# Altium PCB main_board.PcbDoc
Units mm, origin at the board's own origin, x right, y up, seen from the top; angles counter-clockwise.
Board outline 102 x 125 mm, 2 copper layers (Top Layer, Bottom Layer), stack 1.58 mm thick; 104 components, 116 nets, 582 pads, 10 vias.
Unrouted connection lines stored in the file: 179.
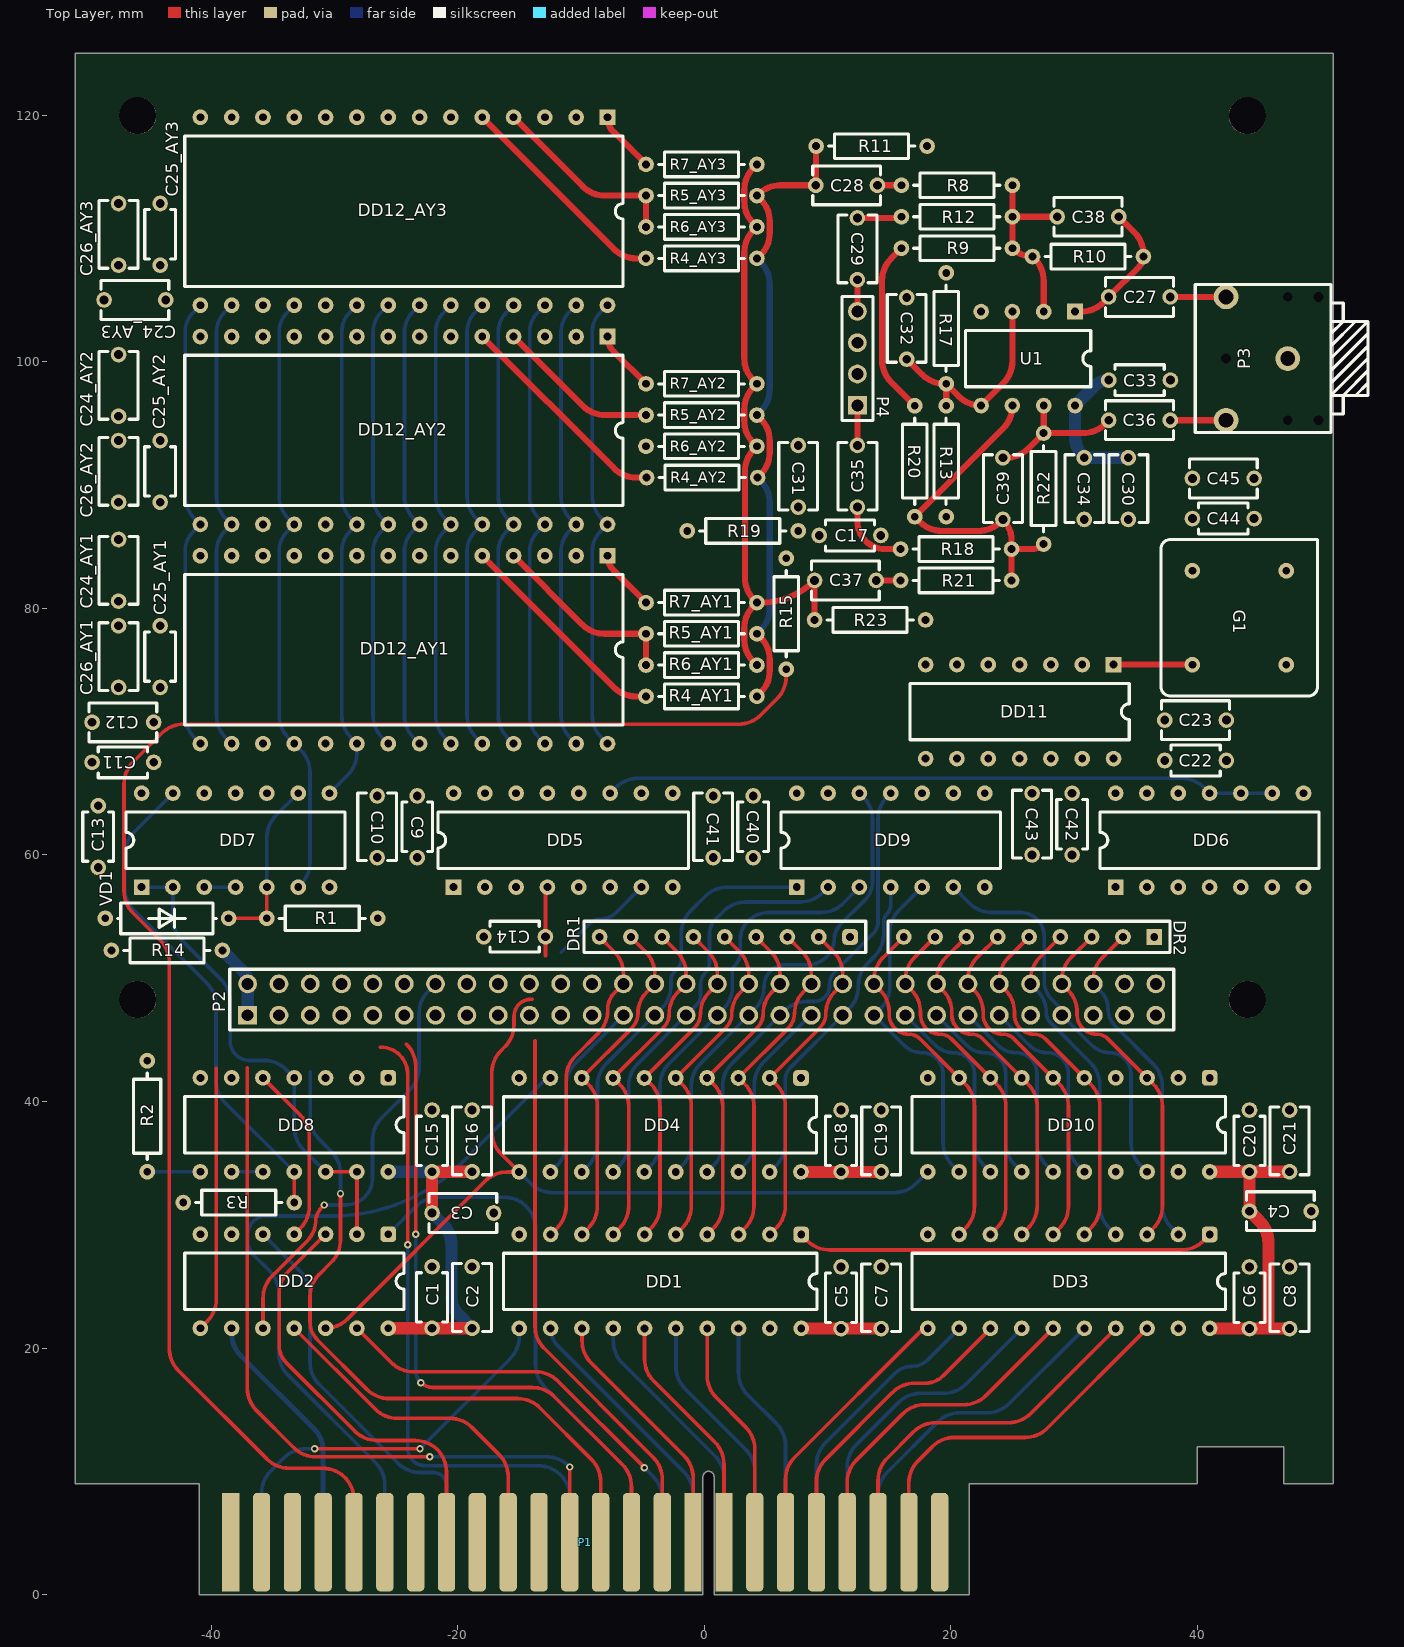
[diagram p0: Top Layer view]
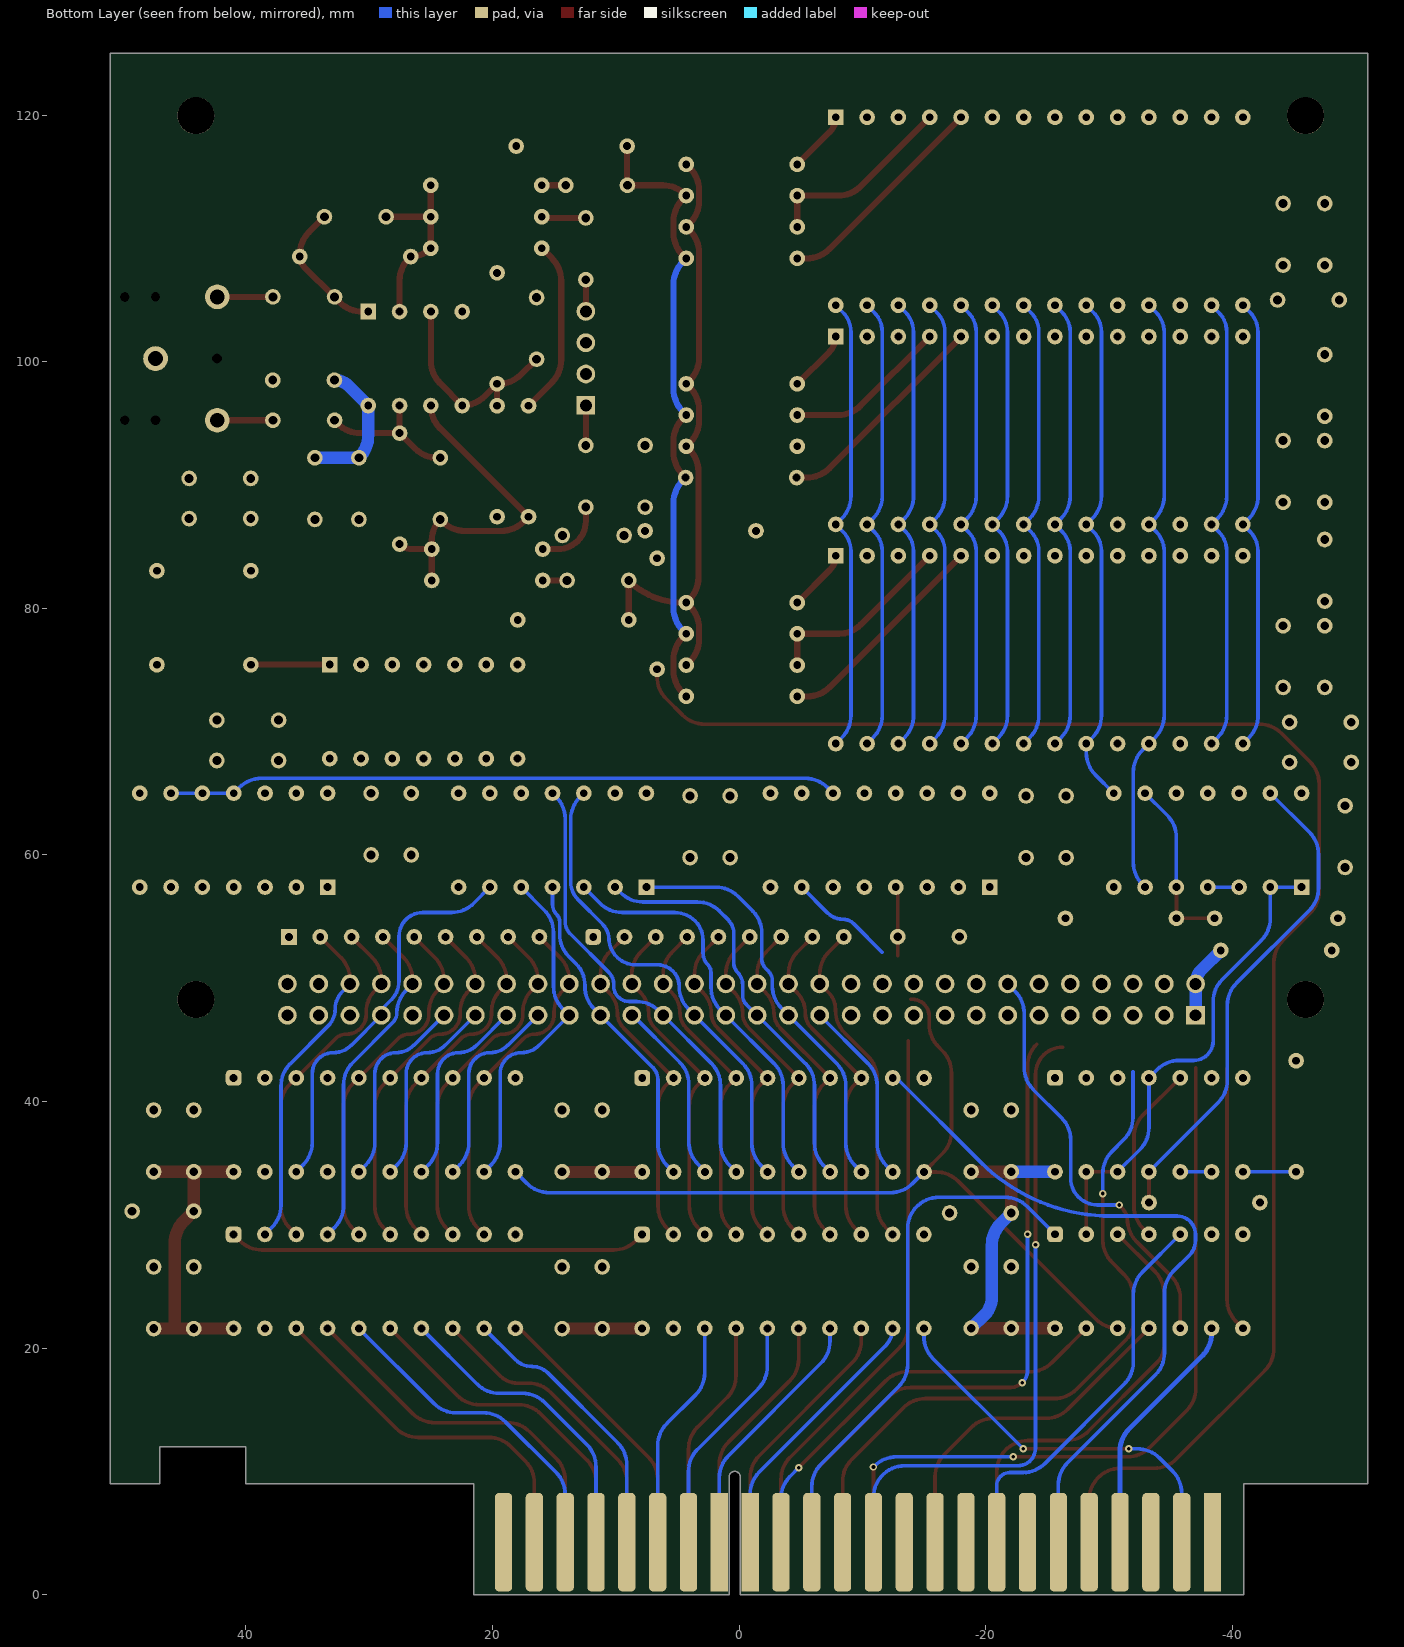
[diagram p1: Bottom Layer view, seen from below]
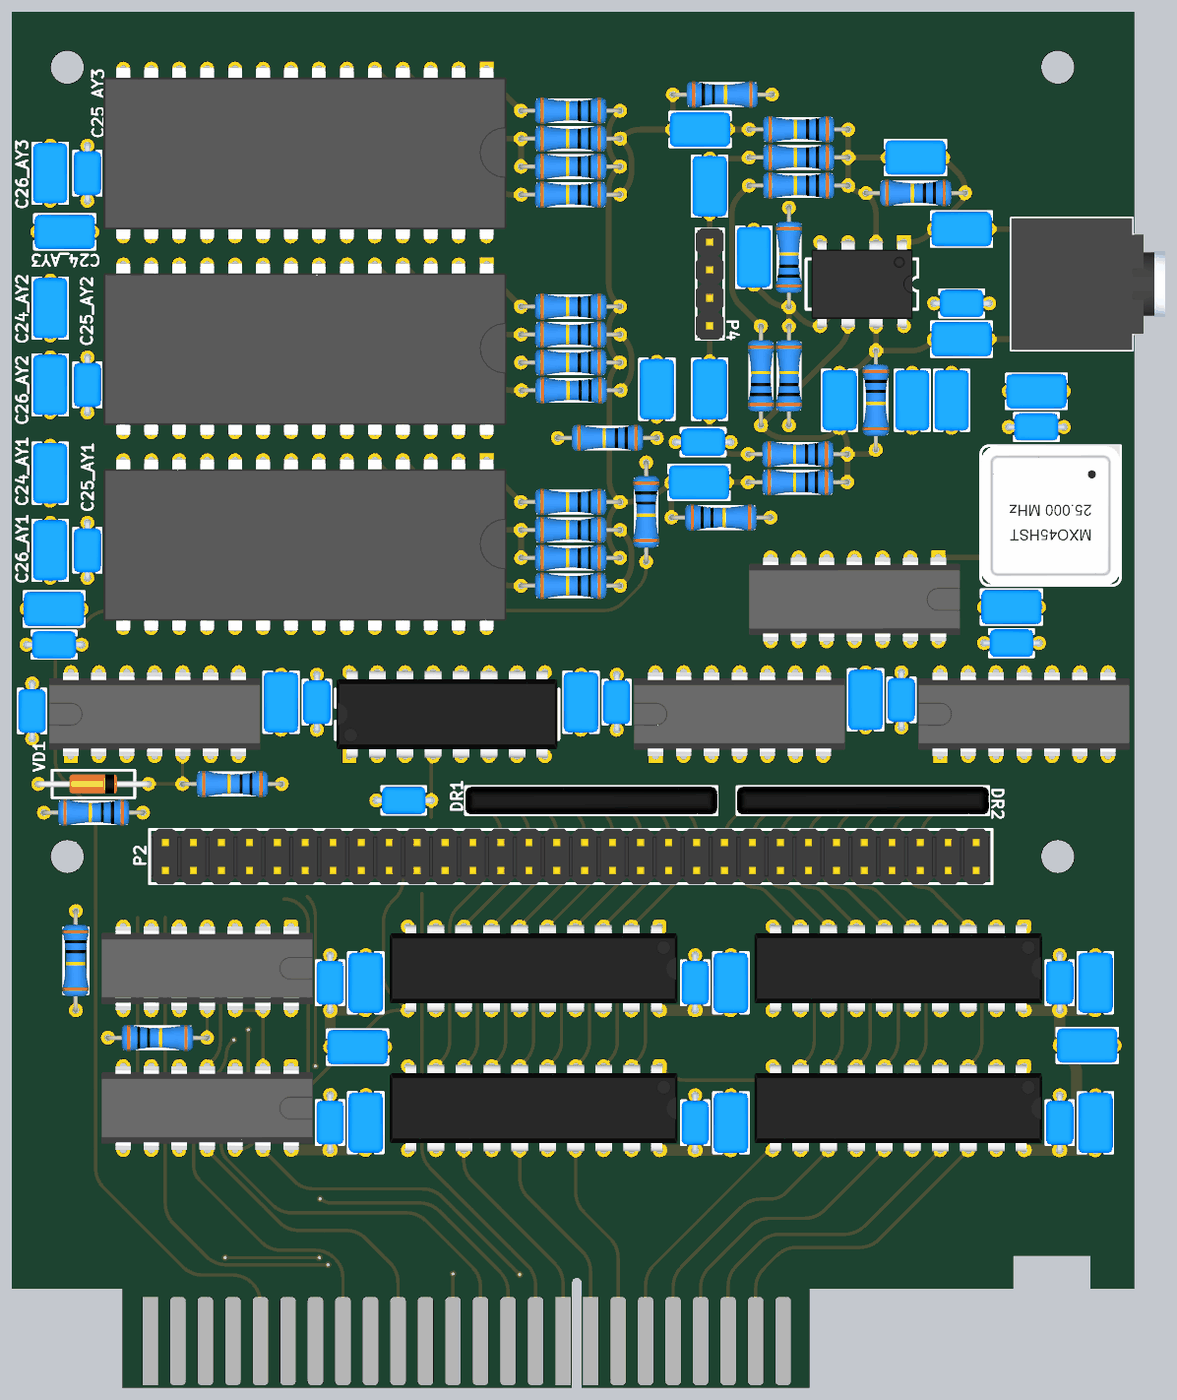
[diagram p2: 3D render of the assembled board from above, using the file's embedded part models]

## Layer stack, top to bottom
Top Solder: solder mask 0.0102, Solder Resist, Dk 3.5
Top Layer: signal copper 0.035
Dielectric 1: dielectric 1.51, FR-4, Dk 4.8
Bottom Layer: signal copper 0.035
Bottom Solder: solder mask 0.0102, Solder Resist, Dk 3.5

## Board outline
-40.95,0 -0.1,0 -0.1,9.552 cw(c0.35,9.55) 0.8,9.55 0.8,0 21.5,0 21.5,9 40,9 40,12 47,12 47,9 51,9 51,125 -51,125 -51,9 -40.95,9

## Design rules (kind name [scope] priority, off if disabled: settings)
BoardOutlineClearance [OnCopper] p1: gap=0.25 ignorepadtopadclearanceinfootprint=FALSE
Clearance BigHoleClearance [IsPad && HoleDiameter > 5] p1: gap=0.15 ignorepadtopadclearanceinfootprint=FALSE except(0.45: Arc-Hole Track-Hole SMDPad-Hole THPad-Hole Via-Hole Fill-Hole Poly-Hole Region-Hole Text-Hole)
Clearance KeepOutClearance [Keepout] p2: gap=0.2 ignorepadtopadclearanceinfootprint=FALSE
Clearance PolygonClearanceAllLayers [All vs InPolygon] p3: gap=0.2 ignorepadtopadclearanceinfootprint=FALSE
Clearance ClearanceInternalLayers [All vs OnMid] p4: gap=0.1 ignorepadtopadclearanceinfootprint=FALSE
Clearance ClearanceTopBottomLayers [All] p5: gap=0.15 ignorepadtopadclearanceinfootprint=FALSE
ComponentClearance [All] p1: gap=0.15 collisioncheckmode=3 verticalgap=0.15 showdistances=FALSE
DiffPairsRouting [All] p1: maxlimit=0.15 minlimit=0.1 mostfreqgap=0.15 toplayer_minwidth=0.1 toplayer_maxwidth=0.5 toplayer_prefwidth=0.3 bottomlayer_minwidth=0.1 bottomlayer_maxwidth=0.5 bottomlayer_prefwidth=0.3 maxuncoupledlength=12.7
HoleSize [All] p1: absolutevalues=TRUE maxlimit=10 minlimit=0.2 maxpercent=80.000 minpercent=20.000
HoleToHoleClearance [All] p1: gap=0.2 allowstackedmicrovias=TRUE
MatchedLengths [InDifferentialPairClass('All Differential Pairs')] p1: tolerance=0.3 checknetsindiffpair=TRUE checkdiffpairvsdiffpair=FALSE checkxsignals=FALSE checkothers=FALSE
MinimumAnnularRing [All] p1: minimumring=0.1
MinimumSolderMaskSliver [All] p1: minsoldermaskwidth=0.1
PolygonConnect [All] p1: thpad.connectstyle=Relief thpad.reliefconductorwidth=0.3 thpad.reliefentries=4 thpad.polygonreliefangle="90 Angle" thpad.airgapwidth=0.25 smdpad.connectstyle=Relief smdpad.reliefconductorwidth=0.25 smdpad.reliefentries=4 smdpad.polygonreliefangle="90 Angle" smdpad.airgapwidth=0.25 via.connectstyle=Direct via.reliefconductorwidth=0.254 via.reliefentries=4 via.polygonreliefangle="90 Angle" via.airgapwidth=0.254
RoutingVias [All] p1: holewidth=0.2 width=0.5 viastyle="Through Hole" minholewidth=0.2 minwidth=0.4 maxholewidth=1 maxwidth=2
SilkToSilkClearance [All] p1: silktosilkclearance=0.01
SilkToSolderMaskClearance [IsPad] p1: minsilkscreentomaskgap=0.01 clearancetoexposedcopper=TRUE
SolderMaskExpansion [All] p1: expansion=0.05
ViasUnderSMD [All] p1: allowed=TRUE
Width WidthInternalLayers [OnMid] p1: maxlimit=8 minlimit=0.1 preferedwidth=0.25
Width WidthTopBottomLayers [OnTopLayer Or OnBottomLayer] p2: maxlimit=8 minlimit=0.15 preferedwidth=0.25
23 further rules are at their usual default settings.

## Classes and differential pairs
channel class ay: AY1 AY2 AY3
net class R_IN[1..3]: R_IN3
net class L_IN[1..3]: L_IN3
net class CS_AY[1..3]: CS_AY1 CS_AY2 CS_AY3
net class C\S\[1..5]: C\S\1 C\S\2 C\S\3 C\S\4 C\S\5
net class C\E\[0..3]: C\E\0 C\E\1 C\E\2 C\E\3
net class AD[0..15]: AD0 AD1 AD2 AD3 AD4 AD5 AD6 AD7 AD8 AD9 AD10 AD11 AD12 AD13 AD14 AD15
net class A[0..12]: A0 A1 A2 A3 A4 A5 A6 A7 A8 A9 A10 A11 A12
component class "System Bus": C1 C2 C3 C4 C5 C6 C7 C8 DD1 DD2 DD3 DR1 DR2 P1
component class "Future Connector": P2
component class AY3: C24_AY3 C25_AY3 C26_AY3 DD12_AY3 R4_AY3 R5_AY3 R6_AY3 R7_AY3
component class AY2: C24_AY2 C25_AY2 C26_AY2 DD12_AY2 R4_AY2 R5_AY2 R6_AY2 R7_AY2
component class AY1: C24_AY1 C25_AY1 C26_AY1 DD12_AY1 R4_AY1 R5_AY1 R6_AY1 R7_AY1
component class "Audio Mixer": C17 C27 C28 C29 C30 C31 C32 C33 C34 C35 C36 C37 C38 C39 P3 P4 R8 R9 R10 R11 R12 R13 R15 R17 R18 R19 R20 R21 R22 R23 U1
component class "Address Detector": C9 C10 C11 C12 C13 C14 C15 C16 C18 C19 C20 C21 C22 C23 C40 C41 C42 C43 C44 C45 DD4 DD5 DD6 DD7 DD8 DD9 DD10 DD11 G1 R1 R2 R3 R14 VD1

## Components (designator, comment, footprint, x,y, rotation, side; value= is the part's Value field where it differs from the comment)
C1 "0.1u" "CAP 4x2.5" -22.075,24.1 r270 top
C2 "4.7u" "CAP 5.5x3.15" -18.825,24.1 r270 top
C3 "10u" "CAP 5.5x3.15" -19.575,30.95 r180 top
C4 "10u" "CAP 5.5x3.15" 46.725,31.1 r180 top
C5 "0.1u" "CAP 4x2.5" 11.1,24.075 r270 top
C6 "0.1u" "CAP 4x2.5" 44.225,24.075 r270 top
C7 "4.7u" "CAP 5.5x3.15" 14.35,24.075 r270 top
C8 "4.7u" "CAP 5.5x3.15" 47.475,24.075 r270 top
C9 "0.1u" "CAP 4x2.5" -23.275,62.275 r90 top
C10 "4.7u" "CAP 5.5x3.15" -26.525,62.275 r90 top
C11 "0.1u" "CAP 4x2.5" -47.15,67.5 r0 top
C12 "4.7u" "CAP 5.5x3.15" -47.15,70.75 r0 top
C13 "62" "CAP 4x2.5" -49.15,61.475 r270 top
C14 "200" "CAP 4x2.5" -15.375,53.36 r0 top
C15 "0.1u" "CAP 4x2.5" -22.075,36.8 r270 top
C16 "4.7u" "CAP 5.5x3.15" -18.825,36.8 r270 top
C17 "Cap" "CAP 4x2.5" 11.825,85.9 r180 top
C18 "0.1u" "CAP 4x2.5" 11.1,36.8 r270 top
C19 "4.7u" "CAP 5.5x3.15" 14.35,36.8 r270 top
C20 "0.1u" "CAP 4x2.5" 44.225,36.8 r270 top
C21 "4.7u" "CAP 5.5x3.15" 47.475,36.8 r270 top
C22 "0.1u" "CAP 4x2.5" 39.85,67.65 r180 top
C23 "4.7u" "CAP 5.5x3.15" 39.85,70.925 r180 top
C24_AY1 "10u" "CAP 5.5x3.15" -47.5,83.075 r270 top (schematic designator C24)
C24_AY2 "10u" "CAP 5.5x3.15" -47.5,98.075 r270 top (schematic designator C24)
C24_AY3 "10u" "CAP 5.5x3.15" -46.175,105 r180 top (schematic designator C24)
C25_AY1 "0.1u" "CAP 4x2.5" -44.125,76.075 r270 top (schematic designator C25)
C25_AY2 "0.1u" "CAP 4x2.5" -44.125,91.1 r270 top (schematic designator C25)
C25_AY3 "0.1u" "CAP 4x2.5" -44.125,110.325 r270 top (schematic designator C25)
C26_AY1 "4.7u" "CAP 5.5x3.15" -47.5,76.075 r270 top (schematic designator C26)
C26_AY2 "4.7u" "CAP 5.5x3.15" -47.5,91.1 r270 top (schematic designator C26)
C26_AY3 "4.7u" "CAP 5.5x3.15" -47.5,110.325 r270 top (schematic designator C26)
C27 "10u" "CAP 5.5x3.15" 35.304,105.25 r0 top
C28 "10u" "CAP 5.5x3.15" 11.55,114.3 r0 top
C29 "10u" "CAP 5.5x3.15" 12.425,109.15 r90 top
C30 "10u" "CAP 5.5x3.15" 34.4,89.7 r90 top
C31 "10u" "CAP 5.5x3.15" 7.625,90.703 r90 top
C32 "10u" "CAP 5.5x3.15" 16.425,102.7 r270 top
C33 "0.1u" "CAP 4x2.5" 35.314,98.5 r180 top
C34 "4.7u" "CAP 5.5x3.15" 30.825,89.7 r90 top
C35 "10u" "CAP 5.5x3.15" 12.425,90.703 r270 top
C36 "10u" "CAP 5.5x3.15" 35.304,95.25 r0 top
C37 "10u" "CAP 5.5x3.15" 11.45,82.25 r0 top
C38 "1200 NC" "CAP 5.5x3.15" 31.125,111.75 r180 top
C39 "1200 NC" "CAP 5.5x3.15" 24.225,89.7 r270 top
C40 "0.1u" "CAP 4x2.5" 3.975,62.275 r90 top
C41 "4.7u" "CAP 5.5x3.15" 0.725,62.275 r90 top
C42 "0.1u" "CAP 4x2.5" 29.84,62.487 r90 top
C43 "4.7u" "CAP 5.5x3.15" 26.59,62.487 r90 top
C44 "0.1u" "CAP 4x2.5" 42.1,87.275 r180 top
C45 "4.7u" "CAP 5.5x3.15" 42.1,90.525 r180 top
DD1 "74F642N" DIP20 7.865,29.21 r270 top
DD2 "74x1034" DIP14#1 -25.625,29.225 r270 top
DD3 "74F642N" DIP20 40.995,29.21 r270 top
DD4 "74x573" DIP20 7.85,41.9 r270 top
DD5 "74x138" DIP16 -20.331,57.38 r90 top
DD6 "74x27" DIP14#2 33.365,57.38 r90 top
DD7 "74x08" DIP14#2 -45.63,57.38 r90 top
DD8 "74x38" DIP14#1 -25.625,41.91 r270 top
DD9 "74x30" DIP14#2 7.509,57.38 r90 top
DD10 "74x573" DIP20 40.995,41.91 r270 top
DD11 "74x393" DIP14#2 33.2,75.425 r270 top
DD12_AY1 "AY-3-8912" DIP28 -7.844,84.256 r270 top (schematic designator DD12)
DD12_AY2 "AY-3-8912" DIP28 -7.844,102.036 r270 top (schematic designator DD12)
DD12_AY3 "AY-3-8912" DIP28 -7.844,119.816 r270 top (schematic designator DD12)
DR1 "RNA8" SIP9#1 11.83,53.34 r270 top
DR2 "RNA8" SIP9#2 36.505,53.34 r270 top
G1 "CXO" "DIP8 CXO" 49.75,85.575 r270 top
P1 "EDGE" "SNP15-48 EDGE" -38.4,4.25 r0 top locked
P2 "PLD60" PLD60 -0.2,48.26 r180 top
P3 "3.5mm audio socket" ST-111 47.325,100.25 r180 top
P4 "Header 4" PLS4 12.425,100.265 r270 top
R1 "2.2K" "Axial Res 0.25"#1 -26.475,54.85 r180 top
R2 "2.2K" "Axial Res 0.25"#2 -45.175,38.8 r270 top
R3 "2.2K" "Axial Res 0.25"#1 -42.25,31.8 r0 top
R4_AY1 "1K" "Axial Res 0.25"#1 4.28,72.85 r180 top (schematic designator R4)
R4_AY2 "1K" "Axial Res 0.25"#1 4.33,90.6 r180 top (schematic designator R4)
R4_AY3 "1K" "Axial Res 0.25"#1 4.28,108.375 r180 top (schematic designator R4)
R5_AY1 "2.2K" "Axial Res 0.25"#1 4.28,77.925 r180 top (schematic designator R5)
R5_AY2 "2.2K" "Axial Res 0.25"#1 4.28,95.67 r180 top (schematic designator R5)
R5_AY3 "2.2K" "Axial Res 0.25"#1 4.28,113.465 r180 top (schematic designator R5)
R6_AY1 "2.2K" "Axial Res 0.25"#1 4.28,75.385 r180 top (schematic designator R6)
R6_AY2 "2.2K" "Axial Res 0.25"#1 4.28,93.13 r180 top (schematic designator R6)
R6_AY3 "2.2K" "Axial Res 0.25"#1 4.28,110.925 r180 top (schematic designator R6)
R7_AY1 "1K" "Axial Res 0.25"#1 4.28,80.455 r180 top (schematic designator R7)
R7_AY2 "1K" "Axial Res 0.25"#1 4.28,98.2 r180 top (schematic designator R7)
R7_AY3 "1K" "Axial Res 0.25"#1 4.28,115.995 r180 top (schematic designator R7)
R8 "24k" "Axial Res 0.25"#1 25,114.3 r180 top
R9 "100K" "Axial Res 0.25"#1 25,109.2 r180 top
R10 "10k" "Axial Res 0.25"#1 35.625,108.525 r180 top
R11 "510" "Axial Res 0.25"#1 9.075,117.475 r0 top
R12 "24k" "Axial Res 0.25"#1 25,111.75 r180 top
R13 "1K" "Axial Res 0.25"#1 19.625,87.425 r90 top
R14 "10K" "Axial Res 0.25"#2 -43.575,52.25 r180 top
R15 "510" "Axial Res 0.25"#1 6.65,84.05 r270 top
R17 "1K" "Axial Res 0.25"#1 19.625,98.2 r90 top
R18 "24k" "Axial Res 0.25"#1 24.925,84.8 r180 top
R19 "510" "Axial Res 0.25"#1 7.625,86.275 r180 top
R20 "100K" "Axial Res 0.25"#1 17.075,87.425 r90 top
R21 "24k" "Axial Res 0.25"#1 24.925,82.25 r180 top
R22 "10k" "Axial Res 0.25"#1 27.525,94.2 r270 top
R23 "510" "Axial Res 0.25"#1 8.95,79.05 r0 top
U1 "LM358N" DIP8 30.075,104.06 r270 top
VD1 "D9B" D9 -43.575,54.85 r0 top locked

## Footprints (in the part's own frame and the unit in brackets; to place one, negate y for a bottom-side part, rotate by r counter-clockwise, add the part's x,y. Pads: shape width x height; smd on the part's side, far side on the other; paste and mask are expansions set on the pad)
"Axial Res 0.25"#1 [mm]
  round 1.27 hole 0.635: 1(0,0) 2(9,0)
  silkscreen extent 1,-1 8,1, body extent -0.19,-1.19 9.21,1.19, height 2.57
"Axial Res 0.25"#2 [mm]
  round 1.27 hole 0.635: 1(-4.5,0) 2(4.5,0)
  silkscreen extent -3.5,-1.1 3.5,1.1, body extent -4.7,-1.2 4.7,1.18, height 2.57
"CAP 4x2.5" [mm]
  round 1.27 hole 0.711: 1(-2.5,0) 2(2.5,0)
  silkscreen extent -2,-1.25 2,1.25, body extent -2.75,-1.25 2.75,1.25, height 5.8
"CAP 5.5x3.15" [mm]
  round 1.27 hole 0.711: 1(-2.5,0) 2(2.5,0)
  silkscreen extent -2.75,-1.58 2.75,1.58, body extent -2.75,-1.57 2.75,1.58, height 6.05
D9 [mm]
  round 1.27 hole 0.635: 1(-5,0) 2(5,0)
  silkscreen extent -4,-1.25 4,1.25, body extent -5.37,-0.88 5.32,0.88, height 2.15
DIP8 [mm]
  rect 1.27x1.27 hole 0.635: 1(0,0)
  round 1.27 hole 0.635: 2(0,-2.54) 3(0,-5.08) 4(0,-7.62) 5(7.62,-7.62) 6(7.62,-5.08) 7(7.62,-2.54) 8(7.62,0)
  silkscreen extent 1.52,-8.89 6.1,1.27, body extent -0.12,-8.41 7.75,0.79, height 3.85
"DIP8 CXO" [mm]
  round 1.27 hole 0.635: 1(2.54,-2.54) 4(10.16,-2.54) 5(10.16,-10.16) 8(2.54,-10.16)
  silkscreen extent 0,-12.7 12.7,0, body extent 0,-12.7 12.7,0, height 4.6
DIP14#1 [mm]
  rrect50% 1.27x1.27 hole 0.635: 1(0,0)
  round 1.27 hole 0.635: 2(0,-2.54) 3(0,-5.08) 4(0,-7.62) 5(0,-10.16) 6(0,-12.7) 7(0,-15.24) 8(7.62,-15.24) 9(7.62,-12.7) 10(7.62,-10.16) 11(7.62,-7.62) 12(7.62,-5.08) 13(7.62,-2.54) 14(7.62,0)
  silkscreen extent 1.52,-16.51 6.1,1.27, body extent 0,-17.22 7.62,1.98, height 4
DIP14#2 [mm]
  rect 1.27x1.27 hole 0.635: 1(0,0)
  round 1.27 hole 0.635: 2(0,-2.54) 3(0,-5.08) 4(0,-7.62) 5(0,-10.16) 6(0,-12.7) 7(0,-15.24) 8(7.62,-15.24) 9(7.62,-12.7) 10(7.62,-10.16) 11(7.62,-7.62) 12(7.62,-5.08) 13(7.62,-2.54) 14(7.62,0)
  silkscreen extent 1.52,-16.51 6.1,1.27, body extent 0,-17.22 7.62,1.98, height 4
DIP16 [mm]
  rect 1.27x1.27 hole 0.635: 1(0,0)
  round 1.27 hole 0.635: 2(0,-2.54) 3(0,-5.08) 4(0,-7.62) 5(0,-10.16) 6(0,-12.7) 7(0,-15.24) 8(0,-17.78) 9(7.62,-17.78) 10(7.62,-15.24) 11(7.62,-12.7) 12(7.62,-10.16) 13(7.62,-7.62) 14(7.62,-5.08) 15(7.62,-2.54) 16(7.62,0)
  silkscreen extent 1.52,-19.05 6.1,1.27, body extent -0.13,-18.92 7.75,1.14, height 5.33
DIP20 [mm]
  rrect50% 1.27x1.27 hole 0.635: 1(0,0)
  round 1.27 hole 0.635: 2(0,-2.54) 3(0,-5.08) 4(0,-7.62) 5(0,-10.16) 6(0,-12.7) 7(0,-15.24) 8(0,-17.78) 9(0,-20.32) 10(0,-22.86) 11(7.62,-22.86) 12(7.62,-20.32) 13(7.62,-17.78) 14(7.62,-15.24) 15(7.62,-12.7) 16(7.62,-10.16) 17(7.62,-7.62) 18(7.62,-5.08) 19(7.62,-2.54) 20(7.62,0)
  silkscreen extent 1.52,-24.13 6.1,1.27, body extent -0.13,-24.51 7.75,1.65, height 5.33
DIP28 [mm]
  rect 1.27x1.27 hole 0.635: 1(0,0)
  round 1.27 hole 0.635: 2(0,-2.54) 3(0,-5.08) 4(0,-7.62) 5(0,-10.16) 6(0,-12.7) 7(0,-15.24) 8(0,-17.78) 9(0,-20.32) 10(0,-22.86) 11(0,-25.4) 12(0,-27.94) 13(0,-30.48) 14(0,-33.02) 15(15.24,-33.02) 16(15.24,-30.48) 17(15.24,-27.94) 18(15.24,-25.4) 19(15.24,-22.86) 20(15.24,-20.32) 21(15.24,-17.78) 22(15.24,-15.24) 23(15.24,-12.7) 24(15.24,-10.16) 25(15.24,-7.62) 26(15.24,-5.08) 27(15.24,-2.54) 28(15.24,0)
  silkscreen extent 1.52,-34.29 13.72,1.27, body extent -0.1,-34.81 15.49,1.79, height 4.3
PLD60 [mil]
  rect 60x60 hole 38: 1(1450,50)
  round 60 hole 38: 2(1450,-50) 3(1350,50) 4(1350,-50) 5(1250,50) 6(1250,-50) 7(1150,50) 8(1150,-50) 9(1050,50) 10(1050,-50) 11(950,50) 12(950,-50) 13(850,50) 14(850,-50) 15(750,50) 16(750,-50) 17(650,50) 18(650,-50) 19(550,50) 20(550,-50) 21(450,50) 22(450,-50) 23(350,50) 24(350,-50) 25(250,50) 26(250,-50) 27(150,50) 28(150,-50) 29(50,50) 30(50,-50) 31(-50,50) 32(-50,-50) 33(-150,50) 34(-150,-50) 35(-250,50) 36(-250,-50) 37(-350,50) 38(-350,-50) 39(-450,50) 40(-450,-50) 41(-550,50) 42(-550,-50) 43(-650,50) 44(-650,-50) 45(-750,50) 46(-750,-50) 47(-850,50) 48(-850,-50) 49(-950,50) 50(-950,-50) 51(-1050,50) 52(-1050,-50) 53(-1150,50) 54(-1150,-50) 55(-1250,50) 56(-1250,-50) 57(-1350,50) 58(-1350,-50) 59(-1450,50) 60(-1450,-50)
  silkscreen extent -1507,-97 1507,97, body extent -1500,-100 1500,100, height 339
PLS4 [mil]
  rect 60x60 hole 38: 1(150,0)
  round 60 hole 38: 2(50,0) 3(-50,0) 4(-150,0)
  silkscreen extent -198,-49 198,49, body extent -200,-50 200,50, height 332
SIP9#1 [mm]
  rrect50% 1.27x1.27 hole 0.635: 1(0,0)
  round 1.27 hole 0.635: 2(0,-2.54) 3(0,-5.08) 4(0,-7.62) 5(0,-10.16) 6(0,-12.7) 7(0,-15.24) 8(0,-17.78) 9(0,-20.32)
  silkscreen extent -1.27,-21.59 1.27,1.27, body extent -1.25,-21.61 1.25,1.29, height 6.08
SIP9#2 [mm]
  rect 1.27x1.27 hole 0.635: 1(0,0)
  round 1.27 hole 0.635: 2(0,-2.54) 3(0,-5.08) 4(0,-7.62) 5(0,-10.16) 6(0,-12.7) 7(0,-15.24) 8(0,-17.78) 9(0,-20.32)
  silkscreen extent -1.27,-21.59 1.27,1.27, body extent -1.25,-21.61 1.25,1.29, height 6.08
"SNP15-48 EDGE" [mm]
  rect 1.4x8 smd far side: A1(0,0) A16(37.5,0) A17(40,0)
  rrect50% 1.4x8 smd far side: A2(2.5,0) A3(5,0) A4(7.5,0) A5(10,0) A6(12.5,0) A7(15,0) A8(17.5,0) A9(20,0) A10(22.5,0) A11(25,0) A12(27.5,0) A13(30,0) A14(32.5,0) A15(35,0) A18(42.5,0) A19(45,0) A20(47.5,0) A21(50,0) A22(52.5,0) A23(55,0) A24(57.5,0)
  rect 1.4x8 smd: B1(0,0) B16(37.5,0) B17(40,0)
  rrect50% 1.4x8 smd: B2(2.5,0) B3(5,0) B4(7.5,0) B5(10,0) B6(12.5,0) B7(15,0) B8(17.5,0) B9(20,0) B10(22.5,0) B11(25,0) B12(27.5,0) B13(30,0) B14(32.5,0) B15(35,0) B18(42.5,0) B19(45,0) B20(47.5,0) B21(50,0) B22(52.5,0) B23(55,0) B24(57.5,0)
ST-111 [mm]
  round 0 hole 0.762 unplated: 0(0,-5)
  round 2 hole 1.2: 1(0,0) 2(5,5) 3(5,-5)
  round 0 hole 0.8 unplated: ""(-2.5,5) ""(-2.5,-5) ""(0,5) ""(5,0)
  silkscreen extent -6.5,-6 7.5,6, body extent -6.5,-6 7.5,6, height 6

## Part data
C1 C2 C3 C4 C5 C6 C7 C8 C9 C10 C11 C12 C13 C14 C15 C16 C18 C19 C20 C21 C22 C23 C24_AY1 C24_AY2 C24_AY3 C25_AY1 C25_AY2 C25_AY3 C26_AY1 C26_AY2 C26_AY3 C27 C28 C29 C30 C31 C32 C33 C34 C35 C36 C37 C38 C39 C40 C41 C42 C43 C44 C45: library part Cap, "Murata ceramic capacitor"
C17: "Murata ceramic capacitor"
DD1 DD3: library part 74x642
DD2: library part "74x1034 IEEE", "ЛП19 6 buffers"
DD4 DD10: "ИР22 transparent latch"
DD5: "ИД7 3 to 8 DEMUX"
DD6: "ЛЕ4 3x3NOR"
DD7: "ЛИ1 4x2AND"
DD8: "ЛА13 4x2NAND O.C."
DD9: "ЛА2 8NAND"
DD11: "ИЕ19"
G1: Frequency=xx.xxxxxMHz
P1: library part "SNP15-48 EDGE"
P4: library part PLS4
R1 R2 R3 R4_AY1 R4_AY2 R4_AY3 R5_AY1 R5_AY2 R5_AY3 R6_AY1 R6_AY2 R6_AY3 R7_AY1 R7_AY2 R7_AY3 R8 R9 R10 R11 R12 R13 R14 R15 R17 R18 R19 R20 R21 R22 R23: library part "Axial Resistor 0.25"
VD1: library part Diode

## Free pads (board coordinates)
  round 3 hole 3 unplated: 0(-45.95,48.26) 0(-45.95,119.95) 0(44.05,48.26) 0(44.05,119.95)

## Via types
v1: diameter 0.6, hole 0.3, Top Layer to Bottom Layer, tented both sides, 10 vias

## Nets (pads, with @x,y where several pads share a name; then routed paths per layer and width w, separated by ;. In a path a pad name is that pad's centre, name@x,y a point inside that pad or via, vN(x,y) a via of type N, cw(c..) or ccw(c..) an arc to the next point about the centre after c; other vN are vias at no path point)
3.58MHz: DD11.4 P2.55
4MHz: DD2.8 P2.3 | length 21.5
  Top Layer w0.3: DD2.8 -40.319,22.151 ccw(c-42.115,23.947) -39.575,23.947 -39.575,42.7
+5: C1.2 C2.2 C3.2 C4.2 C5.2 C6.2 C7.2 C8.2 C9.2 C10.2 C11.2 C12.2 C15.2 C16.2 C18.2 C19.2 C20.2 C21.2 C22.2 C23.2 C24_AY1.2 C24_AY2.2 C24_AY3.2 C25_AY1.2 C25_AY2.2 C25_AY3.2 C26_AY1.2 C26_AY2.2 C26_AY3.2 C30.2 C33.2 C34.2 C40.2 C41.2 C42.2 C43.2 C44.2 C45.2 DD1.20 DD2.14 DD3.20 DD4.20 DD5.16 DD6.14 DD7.14 DD8.14 DD9.14 DD10.20 DD11.14 DD12_AY1.3 DD12_AY1.19 DD12_AY2.3 DD12_AY2.19 DD12_AY3.3 DD12_AY3.19 DR1.1 DR2.1 G1.8 P1.A1 P1.A24 P2.1 P2.2 R1.1 R2.1 R3.1 R13.1 R14.1 U1.8 | length 84.2
  Top Layer w1: DD2.14 -18.825,21.605 C2.2 ; C3.2 C15.2 C16.2 ; DD4.20 14.302,34.28 ccw(c14.302,34.348) C19.2 ; DD1.20 14.314,21.59 cw(c14.314,21.539) C7.2 ; DD3.20 45.768,21.59 ; DD10.20 C20.2@44.223,34.29 ; C8.2 ccw(c47.439,21.539) 47.439,21.59 45.768,21.59 ; C21.2 cw(c47.451,34.324) 47.451,34.29 C20.2@44.223,34.29 ; C20.2@44.223,34.29 44.225,34.288 C4.2 45.024,30.3 cw(c43.228,28.504) 45.768,28.504 45.768,21.59
  Bottom Layer w1: R14.1 -37.507,50.682 cw(c-38.66,49.53) P2.2 P2.1 ; DD8.14 -25.625,34.3 C15.2 ; C3.2 -21.244,30.119 cw(c-23.04,28.323) -20.5,28.323 -20.5,24.075 ccw(c-18.569,24.075) -19.934,22.709 C2.2 ; C33.2 ccw(c32.814,96.86) 31.655,98.02 U1.8 30.075,94.002 ccw(c32.615,94.002) 30.819,92.206 C34.2 34.374,92.2 cw(c34.374,92.163) C30.2@34.4,92.189
A0: DD10.16 P2.49 | length 16.1
  Bottom Layer w0.3: P2.49 26.358,44.562 ccw(c27.835,46.038) 27.835,43.95 cw(c27.835,42.25) 29.535,42.25 29.535,36.642 ccw(c32.075,36.642) 30.279,34.846 DD10.16
A1: DD5.3 DD10.15 P2.47 | length 16.1
  Bottom Layer w0.3: P2.47 23.818,44.562 ccw(c25.295,46.038) 25.295,43.95 cw(c25.295,42.25) 26.995,42.25 26.995,36.642 ccw(c29.535,36.642) 27.739,34.846 DD10.15
A2: DD5.2 DD10.14 P2.45 | length 16.1
  Bottom Layer w0.3: P2.45 21.278,44.562 ccw(c22.755,46.038) 22.755,43.95 cw(c22.755,42.25) 24.455,42.25 24.455,36.642 ccw(c26.995,36.642) 25.199,34.846 DD10.14
A3: DD5.1 DD10.13 P2.43 | length 16.1
  Bottom Layer w0.3: P2.43 18.738,44.562 ccw(c20.215,46.038) 20.215,43.95 cw(c20.215,42.25) 21.915,42.25 21.915,36.642 ccw(c24.455,36.642) 22.659,34.846 DD10.13
A4: DD4.14 DD9.2 P2.29 | length 33.5
  Bottom Layer w0.3: DD4.14 -6.864,34.806 ccw(c-8.66,36.602) -6.12,36.602 -6.12,41.288 cw(c-3.58,41.288) -5.376,43.084 P2.29 -0.593,47.867 ccw(c-1.302,48.575) -0.3,48.575 -0.3,49.449 cw(c1.151,49.449) 0.125,50.475 ccw(c-0.599,51.199) 0.425,51.199 0.425,53.603 cw(c2.047,53.603) 0.9,54.75 1.581,55.431 cw(c3.377,53.635) 3.377,56.175 7.791,56.175 ccw(c7.791,58.715) 9.588,56.919 DD9.2
A4-7_9-12: DD6.13 DD9.8
A5: DD4.13 DD9.1 P2.27 | length 33.6
  Bottom Layer w0.3: DD4.13 -9.404,34.806 ccw(c-11.2,36.602) -8.66,36.602 -8.66,41.288 cw(c-6.12,41.288) -7.916,43.084 P2.27 -3.444,47.556 ccw(c-5.24,49.352) -2.7,49.352 -2.7,49.789 cw(c-1.587,49.789) -2.374,50.576 -2.15,50.8 ccw(c-2.874,51.524) -1.85,51.524 -1.85,53.648 cw(c0.69,53.648) -1.106,55.444 0.086,56.636 cw(c1.882,54.84) 1.882,57.38 DD9.1
A6: DD4.16 DD9.12 P2.33 | length 39
  Bottom Layer w0.3: DD4.16 -1.784,34.806 ccw(c-3.58,36.602) -1.04,36.602 -1.04,41.288 cw(c1.5,41.288) -0.296,43.084 P2.33 4.106,47.486 ccw(c2.31,49.282) 4.85,49.282 4.85,49.325 cw(c6.6,49.325) 6.6,51.075 8.359,51.075 ccw(c8.359,53.272) 10.531,52.941 ccw(c8.359,53.272) 10.55,53.104 ; 10.556,53.272 cw(c8.359,53.272) 10.55,53.104 ; DD9.12 12.906,64.683 cw(c11.11,62.886) 13.65,62.886 13.65,57.825 cw(c11.538,57.825) 13.03,56.33 11.063,54.363 ccw(c12.3,53.125) 10.55,53.125 cw(c9.645,53.125) 10.55,53.104
A7: DD4.15 DD9.3 P2.31 | length 33.3
  Bottom Layer w0.3: DD4.15 -4.324,34.806 ccw(c-6.12,36.602) -3.58,36.602 -3.58,41.288 cw(c-1.04,41.288) -2.836,43.084 P2.31 1.531,47.451 ccw(c-0.265,49.247) 2.275,49.247 2.275,50.471 cw(c3.129,50.471) 2.525,51.075 ccw(c1.559,52.041) 2.925,52.041 2.925,53.116 cw(c5.059,53.116) 3.55,54.625 cw(c5.24,52.935) 5.24,55.325 9.481,55.325 ccw(c9.481,57.865) 11.278,56.069 DD9.3
A8: DD4.18 DD6.2 P2.37 | length 14.9
  Bottom Layer w0.3: DD4.18@2.8,34.375 3.326,34.901 ccw(c1.53,36.697) 4.07,36.697 4.07,41.383 cw(c6.61,41.383) 4.814,43.179 P2.37@8.72,47.085
A9: DD4.17 DD9.11 P2.35 | length 37.5
  Bottom Layer w0.3: DD4.17 0.756,34.806 ccw(c-1.04,36.602) 1.5,36.602 1.5,41.288 cw(c4.04,41.288) 2.244,43.084 P2.35 6.516,47.356 cw(c8.312,45.56) 8.312,48.1 8.901,48.1 ccw(c8.901,49.367) 10.168,49.367 10.168,49.532 cw(c11.461,49.532) 10.547,50.447 13.693,53.593 ccw(c12.712,54.575) 14.1,54.575 14.1,62.919 cw(c16.64,62.919) 14.844,64.715 DD9.11
A10: DD9.5 DD10.12 P2.41 | length 27.9
  Bottom Layer w0.3: DD9.5 15.794,55.505 ccw(c17.59,53.709) 15.05,53.709 15.05,49.322 cw(c12.51,49.322) 14.306,47.526 P2.41 16.198,44.562 ccw(c17.675,46.038) 17.675,43.95 cw(c17.675,42.25) 19.375,42.25 19.375,36.642 ccw(c21.915,36.642) 20.119,34.846 DD10.12
A11: DD4.19 DD9.4 P2.39 | length 26.6
  Bottom Layer w0.3: DD4.19 5.836,34.806 ccw(c4.04,36.602) 6.58,36.602 6.58,41.756 cw(c7.991,41.756) 6.993,42.753 P2.39 11.756,47.516 ccw(c9.96,49.312) 12.5,49.312 12.5,49.398 cw(c15.04,49.398) 13.244,51.194 13.806,51.756 ccw(c12.01,53.552) 14.55,53.552 14.55,54.571 cw(c15.404,54.571) 14.8,55.175 ccw(c14.007,55.968) 15.129,55.968 DD9.4
A12: DD9.6 DD10.18 P2.53 | length 32.2
  Bottom Layer w0.3: DD9.6 21.52,56.069 ccw(c23.316,57.865) 23.316,55.325 25.65,55.325 cw(c25.65,53.4) 27.575,53.4 27.575,49.759 ccw(c29.709,49.759) 28.2,48.25 28.692,47.758 cw(c27.924,46.99) P2.53 31.438,44.562 ccw(c32.915,46.038) 32.915,43.95 cw(c32.915,42.25) 34.615,42.25 34.615,36.642 ccw(c37.155,36.642) 35.359,34.846 DD10.18
A\D\0\: DD3.15 P1.B21 | length 27
  Top Layer w0.3: P1.B21 11.6,9.123 cw(c14.14,9.123) 12.344,10.919 16.081,14.656 cw(c17.877,12.86) 17.877,15.4 21.053,15.4 ccw(c21.053,17.94) 22.849,16.144 DD3.15
A\D\1\: DD3.14 P1.A21 | length 25.2
  Bottom Layer w0.3: P1.A21 11.6,10.373 cw(c14.14,10.373) 12.344,12.169 15.756,15.581 cw(c17.552,13.785) 17.552,16.325 19.438,16.325 ccw(c19.438,18.865) 21.234,17.069 DD3.14
A\D\1\0\: DD3.11 P1.B19 | length 22.2
  Top Layer w0.3: P1.B19 6.6,9.348 cw(c9.14,9.348) 7.344,11.144 17.546,21.346 cw(c18.135,20.757) DD3.11
A\D\1\1\: DD1.18 P1.A19 | length 18.7
  Bottom Layer w0.3: DD1.18 2.785,17.992 ccw(c5.325,17.992) 3.529,16.196 5.856,13.869 cw(c4.06,12.073) 6.6,12.073 P1.A19
A\D\1\2\: DD3.17 P1.B22 | length 29.7
  Top Layer w0.3: P1.B22 14.1,9.273 cw(c16.64,9.273) 14.844,11.069 16.981,13.206 cw(c18.777,11.41) 18.777,13.95 24.683,13.95 ccw(c24.683,16.49) 26.479,14.694 DD3.17
A\D\1\3\: DD3.16 P1.A22 | length 26.5
  Bottom Layer w0.3: P1.A22 14.1,8.123 cw(c16.64,8.123) 14.844,9.919 18.931,14.006 cw(c20.727,12.21) 20.727,14.75 22.943,14.75 ccw(c22.943,17.29) 24.739,15.494 DD3.16
A\D\1\4\: DD3.18 P1.B23 | length 29.6
  Top Layer w0.3: P1.B23 16.6,9.048 cw(c19.14,9.048) 17.344,10.844 18.506,12.006 cw(c20.302,10.21) 20.302,12.75 26.023,12.75 ccw(c26.023,15.29) 27.819,13.494 DD3.18
A\D\1\5\: DD1.11 P1.A2 | length 31.7
  Top Layer w0.3: v1(-31.6,11.825) v1(-23.05,11.825)
  Bottom Layer w0.3: P1.A2 -35.9,8.223 cw(c-33.36,8.223) -35.156,10.019 -34.094,11.081 cw(c-32.298,9.285) -32.298,11.825 v1(-31.6,11.825) ; v1(-23.05,11.825) -15.739,19.136 ccw(c-17.535,20.932) -14.995,20.932 DD1.11
A\D\2\: DD3.13 P1.B20 | length 24.5
  Top Layer w0.3: P1.B20 9.1,9.173 cw(c11.64,9.173) 9.844,10.969 15.281,16.406 cw(c17.077,14.61) 17.077,17.15 17.95,17.15 ccw(c17.95,19.142) 19.358,17.733 DD3.13
A\D\3\: DD3.12 P1.A20 | length 22.8
  Bottom Layer w0.3: P1.A20 9.1,10.523 cw(c11.64,10.523) 9.844,12.319 15.495,17.97 cw(c16.775,16.689) 16.775,18.5 ccw(c16.775,20.455) 18.158,19.073 DD3.12
A\D\4\: DD1.13 P1.B16 | length 20.9
  Top Layer w0.3: DD1.13 -9.915,20.592 ccw(c-7.375,20.592) -9.171,18.796 -1.644,11.269 cw(c-3.44,9.473) -0.9,9.473 P1.B16
A\D\5\: DD1.12 P1.A16 | length 21.9
  Bottom Layer w0.3: DD1.12 ccw(c-10.439,21.59) -11.865,20.165 -1.644,9.944 cw(c-3.44,8.148) -0.9,8.148 P1.A16
A\D\6\: DD1.15 P1.B17 | length 19.8
  Top Layer w0.3: DD1.15 -4.835,19.112 ccw(c-2.295,19.112) -4.091,17.316 0.856,12.369 cw(c-0.94,10.573) 1.6,10.573 P1.B17
A\D\7\: DD1.14 P1.A17 | length 20.8
  Bottom Layer w0.3: DD1.14 -7.375,20.552 ccw(c-4.835,20.552) -6.631,18.756 0.856,11.269 cw(c-0.94,9.473) 1.6,9.473 P1.A17
A\D\8\: DD1.17 P1.B18 | length 18.7
  Top Layer w0.3: DD1.17 0.245,17.757 ccw(c2.785,17.757) 0.989,15.961 3.356,13.594 cw(c1.56,11.798) 4.1,11.798 P1.B18
A\D\9\: DD1.16 P1.A18 | length 19.8
  Bottom Layer w0.3: DD1.16 -2.295,18.497 ccw(c0.245,18.497) -1.551,16.701 3.356,11.794 cw(c1.56,9.998) 4.1,9.998 P1.A18
AD0: DD3.5 DD10.5 DD12_AY1.28 DD12_AY2.28 DD12_AY3.28 DR2.5 P2.50 | length 66.3
  Top Layer w0.3: DR2.5 24.674,51.669 ccw(c26.47,49.873) 23.93,49.873 P2.50 24.416,49.044 cw(c22.62,47.248) 25.16,47.248 25.16,47.05 ccw(c26.76,47.05) 26.76,45.45 cw(c26.76,44.159) 27.673,45.072 DD10.5 31.341,41.404 cw(c29.545,39.608) 32.085,39.608 32.085,31.512 cw(c29.545,31.512) 31.341,29.716 DD3.5
  Bottom Layer w0.3: DD12_AY1.28 -8.331,69.503 cw(c-6.535,71.299) -9.075,71.299 -9.075,84.625 cw(c-6.804,84.625) -8.41,86.23 DD12_AY2.28 -8.331,87.283 cw(c-6.535,89.079) -9.075,89.079 -9.075,102.405 cw(c-6.804,102.405) -8.41,104.01 DD12_AY3.28
AD1: DD3.6 DD10.6 DD12_AY1.27 DD12_AY2.27 DD12_AY3.27 DR2.6 P2.48 | length 66.3
  Top Layer w0.3: DR2.6 22.134,51.669 ccw(c23.93,49.873) 21.39,49.873 P2.48 21.876,49.044 cw(c20.08,47.248) 22.62,47.248 22.62,47.05 ccw(c24.22,47.05) 24.22,45.45 cw(c24.22,44.159) 25.133,45.072 DD10.6 28.801,41.404 cw(c27.005,39.608) 29.545,39.608 29.545,31.512 cw(c27.005,31.512) 28.801,29.716 DD3.6
  Bottom Layer w0.3: DD12_AY1.27 -10.871,69.503 cw(c-9.075,71.299) -11.615,71.299 -11.615,84.625 cw(c-9.344,84.625) -10.95,86.23 DD12_AY2.27 -10.871,87.283 cw(c-9.075,89.079) -11.615,89.079 -11.615,102.405 cw(c-9.344,102.405) -10.95,104.01 DD12_AY3.27
AD2: DD3.7 DD10.7 DD12_AY1.26 DD12_AY2.26 DD12_AY3.26 DR2.7 P2.46 | length 66.3
  Top Layer w0.3: DR2.7 19.594,51.669 ccw(c21.39,49.873) 18.85,49.873 P2.46 19.336,49.044 cw(c17.54,47.248) 20.08,47.248 20.08,47.05 ccw(c21.68,47.05) 21.68,45.45 cw(c21.68,44.159) 22.593,45.072 DD10.7 26.261,41.404 cw(c24.465,39.608) 27.005,39.608 27.005,31.512 cw(c24.465,31.512) 26.261,29.716 DD3.7
  Bottom Layer w0.3: DD12_AY1.26 -13.411,69.503 cw(c-11.615,71.299) -14.155,71.299 -14.155,84.625 cw(c-11.884,84.625) -13.49,86.23 DD12_AY2.26 -13.411,87.283 cw(c-11.615,89.079) -14.155,89.079 -14.155,102.405 cw(c-11.884,102.405) -13.49,104.01 DD12_AY3.26
AD3: DD3.8 DD10.8 DD12_AY1.25 DD12_AY2.25 DD12_AY3.25 DR2.8 P2.44 | length 66.3
  Top Layer w0.3: DR2.8 17.054,51.669 ccw(c18.85,49.873) 16.31,49.873 P2.44 16.796,49.044 cw(c15,47.248) 17.54,47.248 17.54,47.05 ccw(c19.14,47.05) 19.14,45.45 cw(c19.14,44.159) 20.053,45.072 DD10.8 23.721,41.404 cw(c21.925,39.608) 24.465,39.608 24.465,31.512 cw(c21.925,31.512) 23.721,29.716 DD3.8
  Bottom Layer w0.3: DD12_AY1.25 -15.951,69.503 cw(c-14.155,71.299) -16.695,71.299 -16.695,84.625 cw(c-14.424,84.625) -16.03,86.23 DD12_AY2.25 -15.951,87.283 cw(c-14.155,89.079) -16.695,89.079 -16.695,102.405 cw(c-14.424,102.405) -16.03,104.01 DD12_AY3.25
AD4: DD1.7 DD4.7 DD12_AY1.24 DD12_AY2.24 DD12_AY3.24 DR1.7 P2.30 | length 65.1
  Top Layer w0.3: DD4.7 -3.326,45.964 ccw(c-4.513,47.15) -2.835,47.15 cw(c-0.385,47.15) -2.118,48.882 P2.30 -1.47,50.348 ccw(c-4.01,50.348) -2.214,52.144 DR1.7 ; DD1.7 -6.869,29.716 ccw(c-8.665,31.512) -6.125,31.512 -6.125,39.608 ccw(c-8.665,39.608) -6.869,41.404 DD4.7@-7.375,41.91
  Bottom Layer w0.3: DD12_AY1.24 -18.491,69.503 cw(c-16.695,71.299) -19.235,71.299 -19.235,84.625 cw(c-16.964,84.625) -18.57,86.23 DD12_AY2.24 -18.491,87.283 cw(c-16.695,89.079) -19.235,89.079 -19.235,102.405 cw(c-16.964,102.405) -18.57,104.01 DD12_AY3.24
AD5: DD1.8 DD4.8 DD12_AY1.23 DD12_AY2.23 DD12_AY3.23 DR1.8 P2.28 | length 65.1
  Top Layer w0.3: DD4.8 -5.866,45.964 ccw(c-7.053,47.15) -5.375,47.15 cw(c-2.925,47.15) -4.658,48.882 P2.28 -4.01,50.348 ccw(c-6.55,50.348) -4.754,52.144 DR1.8 ; DD1.8 -9.409,29.716 ccw(c-11.205,31.512) -8.665,31.512 -8.665,39.608 ccw(c-11.205,39.608) -9.409,41.404 DD4.8@-9.915,41.91
  Bottom Layer w0.3: DD12_AY1.23 -21.031,69.503 cw(c-19.235,71.299) -21.775,71.299 -21.775,84.625 cw(c-19.504,84.625) -21.11,86.23 DD12_AY2.23 -21.031,87.283 cw(c-19.235,89.079) -21.775,89.079 -21.775,102.405 cw(c-19.504,102.405) -21.11,104.01 DD12_AY3.23
AD6: DD1.5 DD4.5 DD12_AY1.22 DD12_AY2.22 DD12_AY3.22 DR1.5 P2.34 | length 65.1
  Top Layer w0.3: DD4.5 1.754,45.964 ccw(c0.567,47.15) 2.245,47.15 cw(c4.695,47.15) 2.962,48.882 P2.34 3.61,50.348 ccw(c1.07,50.348) 2.866,52.144 DR1.5 ; DD1.5 -1.789,29.716 ccw(c-3.585,31.512) -1.045,31.512 -1.045,39.608 ccw(c-3.585,39.608) -1.789,41.404 DD4.5@-2.295,41.91
  Bottom Layer w0.3: DD12_AY1.22 -23.571,69.503 cw(c-21.775,71.299) -24.315,71.299 -24.315,84.625 cw(c-22.044,84.625) -23.65,86.23 DD12_AY2.22 -23.571,87.283 cw(c-21.775,89.079) -24.315,89.079 -24.315,102.405 cw(c-22.044,102.405) -23.65,104.01 DD12_AY3.22
AD7: DD1.6 DD4.6 DD12_AY1.21 DD12_AY2.21 DD12_AY3.21 DR1.6 P2.32 | length 65.1
  Top Layer w0.3: DD4.6 -0.786,45.964 ccw(c-1.973,47.15) -0.295,47.15 cw(c2.155,47.15) 0.422,48.882 P2.32 1.07,50.348 ccw(c-1.47,50.348) 0.326,52.144 DR1.6 ; DD1.6 -4.329,29.716 ccw(c-6.125,31.512) -3.585,31.512 -3.585,39.608 ccw(c-6.125,39.608) -4.329,41.404 DD4.6@-4.835,41.91
  Bottom Layer w0.3: DD12_AY1.21 -26.111,69.503 cw(c-24.315,71.299) -26.855,71.299 -26.855,84.625 cw(c-24.584,84.625) -26.19,86.23 DD12_AY2.21 -26.111,87.283 cw(c-24.315,89.079) -26.855,89.079 -26.855,102.405 cw(c-24.584,102.405) -26.19,104.01 DD12_AY3.21
AD8: DD1.3 DD4.3 DR1.3 P2.38 | length 27.9
  Top Layer w0.3: DD4.3 6.834,45.964 ccw(c5.647,47.15) 7.325,47.15 cw(c9.775,47.15) 8.042,48.882 P2.38 8.69,50.348 ccw(c6.15,50.348) 7.946,52.144 DR1.3 ; DD1.3 3.291,29.716 ccw(c1.495,31.512) 4.035,31.512 4.035,39.608 ccw(c1.495,39.608) 3.291,41.404 DD4.3@2.785,41.91
AD9: DD1.4 DD4.4 DR1.4 P2.36 | length 27.9
  Top Layer w0.3: DD4.4 4.294,45.964 ccw(c3.107,47.15) 4.785,47.15 cw(c7.235,47.15) 5.502,48.882 P2.36 6.15,50.348 ccw(c3.61,50.348) 5.406,52.144 DR1.4 ; DD1.4 0.751,29.716 ccw(c-1.045,31.512) 1.495,31.512 1.495,39.608 ccw(c-1.045,39.608) 0.751,41.404 DD4.4@0.245,41.91
AD10: DD3.9 DD10.9 DR2.9 P2.42 | length 29.1
  Top Layer w0.3: DR2.9 14.514,51.669 ccw(c16.31,49.873) 13.77,49.873 P2.42 14.256,49.044 cw(c12.46,47.248) 15,47.248 15,47.05 ccw(c16.6,47.05) 16.6,45.45 cw(c16.6,44.159) 17.513,45.072 DD10.9 21.181,41.404 cw(c19.385,39.608) 21.925,39.608 21.925,31.512 cw(c19.385,31.512) 21.181,29.716 DD3.9
AD11: DD1.2 DD4.2 DR1.2 P2.40 | length 27.9
  Top Layer w0.3: DD4.2 9.374,45.964 ccw(c8.187,47.15) 9.865,47.15 cw(c12.315,47.15) 10.582,48.882 P2.40 11.23,50.348 ccw(c8.69,50.348) 10.486,52.144 DR1.2 ; DD1.2 5.831,29.716 ccw(c4.035,31.512) 6.575,31.512 6.575,39.608 ccw(c4.035,39.608) 5.831,41.404 DD4.2@5.325,41.91
AD12: DD3.3 DD10.3 DR2.3 P2.54 | length 29.1
  Top Layer w0.3: DR2.3 29.754,51.669 ccw(c31.55,49.873) 29.01,49.873 P2.54 29.496,49.044 cw(c27.7,47.248) 30.24,47.248 30.24,47.05 ccw(c31.84,47.05) 31.84,45.45 cw(c31.84,44.159) 32.753,45.072 DD10.3 36.421,41.404 cw(c34.625,39.608) 37.165,39.608 37.165,31.512 cw(c34.625,31.512) 36.421,29.716 DD3.3
AD13: DD3.4 DR2.4 P2.52 | length 27.5
  Top Layer w0.3: P2.52 26.47,49.873 cw(c29.01,49.873) 27.214,51.669 DR2.4
  Bottom Layer w0.3: P2.52 27.006,48.994 cw(c25.21,47.198) 27.75,47.198 ccw(c28.892,47.198) 28.084,46.391 31.331,43.144 cw(c29.535,41.348) 32.075,41.348 32.075,31.562 ccw(c34.615,31.562) 32.819,29.766 DD3.4
AD14: DD3.2 DR2.2 P2.56 | length 27.5
  Top Layer w0.3: P2.56 31.55,49.873 cw(c34.09,49.873) 32.294,51.669 DR2.2
  Bottom Layer w0.3: P2.56 32.181,48.899 cw(c30.807,47.525) 32.75,47.525 ccw(c34.742,47.525) 33.333,46.117 36.406,43.044 cw(c34.61,41.248) 37.15,41.248 37.15,31.567 ccw(c39.69,31.567) 37.894,29.771 DD3.2
AD15: DD1.9 DR1.9 P2.26 | length 26.9
  Top Layer w0.3: DD1.9 -11.944,29.721 ccw(c-13.74,31.517) -11.2,31.517 -11.2,41.873 cw(c-8.66,41.873) -10.456,43.669 -8.569,45.556 ccw(c-10.365,47.352) -7.825,47.352 -7.825,47.475 cw(c-5.942,47.475) -7.274,48.806 P2.26 -6.55,50.348 ccw(c-9.09,50.348) -7.294,52.144 DR1.9
ADDR_DT: DD5.6 DD6.12 DD7.12 DD8.2
B\S\7\: DD4.12 DD6.1 P2.25 | length 14.9
  Bottom Layer w0.3: DD4.12 -11.944,34.806 ccw(c-13.74,36.602) -11.2,36.602 -11.2,41.288 cw(c-8.66,41.288) -10.456,43.084 P2.25
BC1: DD7.8 DD12_AY1.20 DD12_AY2.20 DD12_AY3.20 | length 42
  Bottom Layer w0.3: DD7.8 -28.908,66.482 ccw(c-30.704,68.278) -28.164,68.278 DD12_AY1.20 -28.651,69.503 cw(c-26.855,71.299) -29.395,71.299 -29.395,84.625 cw(c-27.124,84.625) -28.73,86.23 DD12_AY2.20 -28.651,87.283 cw(c-26.855,89.079) -29.395,89.079 -29.395,102.405 cw(c-27.124,102.405) -28.73,104.01 DD12_AY3.20
BDIR: DD7.6 DD12_AY1.18 DD12_AY2.18 DD12_AY3.18 | length 49.5
  Bottom Layer w0.3: DD12_AY3.18 -33.81,104.01 ccw(c-32.204,102.405) -34.475,102.405 -34.475,89.079 ccw(c-31.935,89.079) -33.731,87.283 DD12_AY2.18 -33.81,86.23 ccw(c-32.204,84.625) -34.475,84.625 -34.475,71.299 ccw(c-31.935,71.299) -33.731,69.503 DD12_AY1.18 -32.719,68.491 cw(c-34.515,66.695) -31.975,66.695 -31.975,59.387 cw(c-34.515,59.387) -32.719,57.591 DD7.6
Beeper: P1.B5 R15.2 | length 130.1
  Top Layer w0.3: P1.B5 -28.4,7.71 ccw(c-30.94,7.71) -30.94,10.25 -33.673,10.25 cw(c-33.673,12.79) -35.469,10.994 -42.631,18.156 cw(c-40.835,19.952) -43.375,19.952 -43.375,51.273 ccw(c-45.915,51.273) -44.119,53.069 -46.306,55.256 cw(c-44.51,57.052) -47.05,57.052 -47.05,65.748 cw(c-44.51,65.748) -46.306,67.544 -43.994,69.856 cw(c-42.198,68.06) -42.198,70.6 2.798,70.6 ccw(c2.798,73.14) 4.594,71.344 5.906,72.656 ccw(c4.11,74.452) 6.65,74.452 R15.2
C\E\0: P1.B12 P2.5 | length 61.2
  Top Layer w0.3: -37.05,42.725 -37.05,16.727 ccw(c-34.51,16.727) -36.306,14.931 -33.294,11.919 ccw(c-31.498,13.715) -31.498,11.175 v1(-22.25,11.175) ; P1.B12 v1(-10.9,10.35)
  Bottom Layer w0.3: v1(-22.25,11.175) -12.777,11.175 cw(c-12.777,8.635) -10.981,10.431 v1(-10.9,10.35)
C\E\1: P1.B14 P2.11 | length 53.2
  Top Layer w0.3: -24.144,44.644 cw(c-25.94,42.848) -23.4,42.848 v1(-23.4,29.225) ; v1(-22.975,17.175) -22.925,17.175 ccw(c-22.02,18.08) -22.02,16.8 -13.952,16.8 cw(c-13.952,14.26) -12.156,16.056 -6.644,10.544 cw(c-8.44,8.748) -5.9,8.748 P1.B14
  Bottom Layer w0.3: v1(-23.4,29.225) -23.4,18.201 ccw(c-21.949,18.201) v1(-22.975,17.175)
C\E\2: P1.B13 P2.7 | length 56.4
  Top Layer w0.3: v1(-29.5,32.525) -29.5,28.752 cw(c-32.04,28.752) -30.244,26.956 -31.231,25.969 ccw(c-29.435,24.173) -31.975,24.173 -31.975,22.124 ccw(c-29.926,22.124) -31.375,20.675 -27.344,16.644 ccw(c-25.548,18.44) -25.548,15.9 -15.127,15.9 cw(c-15.127,13.36) -13.331,15.156 -9.144,10.969 cw(c-10.94,9.173) -8.4,9.173 P1.B13
  Bottom Layer w0.3: -31.95,42.381 -31.95,38.702 ccw(c-29.41,38.702) -31.206,36.906 -30.244,35.944 cw(c-32.04,34.148) -29.5,34.148 v1(-29.5,32.525)
C\E\3: P1.A12 P2.9 | length 52.8
  Top Layer w0.3: -26.25,44.4 cw(c-26.25,42.2) -24.05,42.2 v1(-24.05,28.375)
  Bottom Layer w0.3: v1(-24.05,28.375) -24.05,11.9 ccw(c-22.6,11.9) -22.6,10.45 -13.44,10.45 cw(c-13.44,7.91) -10.9,7.91 P1.A12
C\S\1: DD5.9 P2.18
C\S\2: DD5.14 P2.15
C\S\3: DD5.10 P2.16
C\S\4: DD5.12 P2.17
C\S\5: DD5.7 P2.22 | length 8.6
  Bottom Layer w0.3: -11.6,52.1 -9.279,54.421 cw(c-8.425,53.568) -8.425,54.775 ccw(c-8.425,56.535) -7.181,55.29 DD5.7
C\S\_\A\Y\1: DD5.15 DD8.9 DD8.10 | length 2.5
  Bottom Layer w0.3: DD8.9 DD8.10
C\S\_\A\Y\2: DD5.11 DD6.9 DD6.10 DD6.11 | length 54.5
  Bottom Layer w0.3: DD5.11 -7.175,65.456 cw(c-5.379,63.66) -5.379,66.2 38.733,66.2 cw(c38.733,63.66) 40.529,65.456 DD6.11 DD6.9
C\S\_\A\Y\3: DD5.13 DD6.3 DD6.4 DD6.5
CLK_AY1: DD11.5 DD12_AY1.15 DD12_AY2.15 DD12_AY3.15 | length 37.2
  Bottom Layer w0.3: DD12_AY1.15 -41.351,69.503 cw(c-39.555,71.299) -42.095,71.299 -42.095,84.625 cw(c-39.824,84.625) -41.43,86.23 DD12_AY2.15 -41.351,87.283 cw(c-39.555,89.079) -42.095,89.079 -42.095,102.405 cw(c-39.824,102.405) -41.43,104.01 DD12_AY3.15
CS_AY1: DD8.8 DD12_AY1.17 R2.2 | length 4.3
  Bottom Layer w0.3: R2.2 -40.889,34.3 cw(c-40.889,34.266) DD8.8
CS_AY2: DD6.8 DD12_AY2.17
CS_AY3: DD6.6 DD12_AY3.17
D\I\N\: DD2.2 DD7.1 DD7.2 DD8.4 DD8.12 DD8.13 P2.6 | length 39.5
  Top Layer w0.3: DD8.12 DD8.13 DD2.2
  Bottom Layer w0.3: DD7.1 DD7.2 -43.09,54.842 ccw(c-40.55,54.842) -42.346,53.046 -39.194,49.894 cw(c-40.99,48.098) -38.45,48.098 -38.45,44.899 ccw(c-36.876,44.899) -36.876,43.325 -35.712,43.325 cw(c-35.712,40.785) -33.916,42.581 DD8.4 -33.245,37.882 ccw(c-30.705,37.882) -32.501,36.086 DD8.12
D\O\U\T\: DD2.4 DD8.5 P2.4 | length 14.5
  Top Layer w0.3: DD8.5 -32.769,38.894 cw(c-34.565,37.098) -32.025,37.098 -32.025,31.497 cw(c-34.565,31.497) -32.769,29.701 DD2.4
DIN: DD7.13 DD8.11 R3.2 | length 40.1
  Top Layer w0.3: R3.2 -33.245,31.805 DD8.11
  Bottom Layer w0.3: DD7.13 -46.256,61.834 ccw(c-44.46,60.038) -47,60.038 -47,57.302 ccw(c-44.46,57.302) -46.256,55.506 -40.344,49.594 cw(c-42.14,47.798) -39.6,47.798 -39.6,41.697 ccw(c-37.06,41.697) -38.856,39.901 DD8.11
DINOUT: DD7.5 DD7.9 DD8.6 R1.2 VD1.2 | length 14.2
  Top Layer w0.3: VD1.2 R1.2 -35.475,57.375 DD7.5
  Bottom Layer w0.3: DD7.5 -35.47,61.408 cw(c-32.93,61.408) -34.726,63.204 DD7.9
DLDIO: C13.2 DD8.1 R14.2 VD1.1
e4MHz: DD2.9 P1.A4 | length 20.2
  Bottom Layer w0.4: DD2.9 -38.325,21.177 ccw(c-35.785,21.177) -37.581,19.381 -31.644,13.444 cw(c-33.44,11.648) -30.9,11.648 P1.A4
eB\S\7\: DD4.9 P1.A6 | length 58.5
  Bottom Layer w0.3: P1.A6 -25.9,8.898 ccw(c-28.44,8.898) -26.644,10.694 -33.756,17.806 cw(c-31.96,19.602) -34.5,19.602 -34.5,24.448 ccw(c-37.04,24.448) -35.244,26.244 -36.525,27.525 cw(c-35.318,28.732) -37.025,28.732 -37.025,29.207 cw(c-35.532,29.207) -35.532,30.7 -30.19,30.7 ccw(c-30.19,45.704) -19.58,35.095 -12.991,41.684 cw(c-12.47,41.164) DD4.9
eD\I\N\: DD2.1 P1.A14 | length 43
  Bottom Layer w0.3: DD2.1 -23.369,31.481 cw(c-21.573,29.685) -21.573,32.225 -16.215,32.225 cw(c-16.215,29.685) -13.675,29.685 -13.675,18.652 ccw(c-11.135,18.652) -12.931,16.856 -6.644,10.569 cw(c-8.44,8.773) -5.9,8.773 P1.A14
eD\O\U\T\: DD2.3 P1.B8 | length 34.7
  Top Layer w0.3: DD2.3 -33.731,26.199 ccw(c-31.935,24.403) -34.475,24.403 -34.475,20.2 ccw(c-32.544,20.2) -33.909,18.834 -28.319,13.244 ccw(c-26.523,15.04) -26.523,12.5 -23.44,12.5 cw(c-23.44,9.96) -20.9,9.96 P1.B8
eI\N\I\T\: DD2.11 P1.B10 | length 27.9
  Top Layer w0.3: DD2.11 -26.684,15.044 ccw(c-24.888,16.84) -24.888,14.3 -20.627,14.3 cw(c-20.627,11.76) -18.831,13.556 -16.644,11.369 cw(c-18.44,9.573) -15.9,9.573 P1.B10
eS\Y\N\C\: DD2.13 P1.A15 | length 34.3
  Top Layer w0.3: DD2.13 -25.379,18.819 ccw(c-23.583,20.615) -23.583,18.075 -13.677,18.075 cw(c-13.677,15.535) -11.881,17.331 v1(-4.85,10.3)
  Bottom Layer w0.3: v1(-4.85,10.3) -4.144,9.594 cw(c-5.94,7.798) -3.4,7.798 P1.A15
eW\T\B\T\: DD2.5 P1.A8 | length 32.2
  Bottom Layer w0.3: DD2.5 -32.719,26.159 cw(c-34.515,24.363) -31.975,24.363 -31.975,18.852 ccw(c-29.435,18.852) -31.231,17.056 -24.819,10.644 ccw(c-23.023,12.44) -23.023,9.9 -21.958,9.9 cw(c-21.958,8.842) -20.9,8.842 P1.A8
GND: C1.1 C2.1 C3.1 C4.1 C5.1 C6.1 C7.1 C8.1 C9.1 C10.1 C11.1 C12.1 C13.1 C14.1 C15.1 C16.1 C17.1 C18.1 C19.1 C20.1 C21.1 C22.1 C23.1 C24_AY1.1 C24_AY2.1 C24_AY3.1 C25_AY1.1 C25_AY2.1 C25_AY3.1 C26_AY1.1 C26_AY2.1 C26_AY3.1 C30.1 C32.1 C33.1 C34.1 C40.1 C41.1 C42.1 C43.1 C44.1 C45.1 DD1.10 DD1.19 DD2.7 DD3.10 DD3.19 DD4.1 DD4.10 DD5.5 DD5.8 DD6.7 DD7.7 DD8.7 DD9.7 DD10.1 DD10.10 DD11.2 DD11.7 DD11.12 DD11.13 DD12_AY1.6 DD12_AY2.6 DD12_AY3.6 G1.4 P1.B1 P1.B24 P2.57 P2.58 P2.59 P2.60 P3.1 P4.2 P4.3 R11.2 R17.2 R19.2 R23.2 U1.4
I\N\I\T\: DD2.10 DD12_AY1.16 DD12_AY2.16 DD12_AY3.16 P2.14 | length 71.7
  Top Layer w0.3: DD2.10 -35.785,24.038 cw(c-33.245,24.038) -35.041,25.834 -32.244,28.631 ccw(c-34.04,30.427) -31.508,30.227 cw(c-29.843,30.227) -31.02,31.405 v1(-30.825,31.6)
  Bottom Layer w0.3: DD12_AY1.16 -38.811,69.503 cw(c-37.015,71.299) -39.555,71.299 -39.555,84.625 cw(c-37.284,84.625) -38.89,86.23 DD12_AY2.16 -38.811,87.283 cw(c-37.015,89.079) -39.555,89.079 -39.555,102.405 cw(c-37.284,102.405) -38.89,104.01 DD12_AY3.16 ; v1(-30.825,31.6) -29.075,31.6 ccw(c-29.075,33.775) -26.9,33.775 -26.9,36.873 cw(c-24.36,36.873) -26.156,38.669 -23.869,40.956 ccw(c-25.665,42.752) -23.125,42.752 -23.125,47.143 cw(c-20.585,47.143) -22.381,48.939 P2.14
L_IN3: C28.1 R4_AY1.1 R4_AY2.1 R4_AY3.1 R5_AY1.1 R5_AY2.1 R5_AY3.1 R11.1 | length 52
  Top Layer w0.5: R4_AY1.1 4.571,73.141 ccw(c2.775,74.937) 5.315,74.937 5.315,75.838 ccw(c2.775,75.838) 4.571,77.634 R5_AY1.1 ; R5_AY2.1 4.571,95.379 cw(c2.775,93.583) 5.315,93.583 5.315,92.637 cw(c2.775,92.637) 4.571,90.841 R4_AY2.1 ; R4_AY3.1@4.31,108.375 4.571,108.636 ccw(c2.775,110.432) 5.315,110.432 5.315,111.378 ccw(c2.775,111.378) 4.571,113.174 R5_AY3.1 4.371,113.556 cw(c6.167,111.76) 6.167,114.3 9.075,114.3 R11.1
  Bottom Layer w0.5: R5_AY1.1 4.571,78.216 ccw(c2.775,80.012) 5.315,80.012 5.315,88.563 ccw(c2.775,88.563) 4.571,90.359 R4_AY2.1 ; R5_AY2.1 4.571,95.961 ccw(c2.775,97.757) 5.315,97.757 5.315,106.288 ccw(c2.775,106.288) 4.571,108.084 R4_AY3.1
NetC17_2: C17.2 C31.1 R15.1 R19.1
NetC27_1: C27.1 C38.1 R10.1 U1.1 | length 11.5
  Top Layer w0.5: U1.1 30.583,104.06 ccw(c30.583,106.6) 32.379,104.804 32.825,105.25 35.289,107.714 ccw(c34.478,108.525) R10.1 35.625,108.698 ccw(c33.085,108.698) 34.881,110.494 C38.1
NetC27_2: C27.2 P3.3 | length 4.5
  Top Layer w0.5: C27.2 P3.3
NetC28_2: C28.2 R8.2 | length 1.9
  Top Layer w0.5: C28.2@14.053,114.3 R8.2
NetC29_1: C29.1 P4.4 | length 2.6
  Top Layer w0.5: P4.4@12.425,104.06 C29.1@12.425,106.675
NetC29_2: C29.2 R12.2 | length 3.6
  Top Layer w0.5: C29.2@12.425,111.653 15.767,111.653 ccw(c15.767,111.983) R12.2
NetC31_2: C31.2 R9.2 R20.2 | length 14.3
  Top Layer w0.5: R9.2 15.169,108.369 ccw(c16.965,106.573) 14.425,106.573 14.425,100.127 ccw(c16.965,100.127) 15.169,98.331 R20.2
NetC32_2: C32.2 R13.2 R17.1 U1.3 U1.5 | length 17.7
  Top Layer w0.5: C32.2@16.425,100.211 17.692,98.944 ccw(c19.488,100.74) R17.1@19.488,98.2 ; R13.2 19.625,97.869 ccw(c19.157,97.869) R17.1@19.488,98.2 ; U1.3 24.995,100.05 cw(c22.455,100.05) 24.251,98.254 22.437,96.44 cw(c22.437,98.98) 20.641,97.184 R17.1 R17.1@19.488,98.2
NetC35_1: C35.1 P4.1 | length 3.2
  Top Layer w0.5: C35.1 P4.1@12.425,96.44
NetC35_2: C35.2 R18.2 | length 6
  Top Layer w0.5: C35.2@12.425,88.225 12.425,87.058 ccw(c14.683,87.058) 14.683,84.8 R18.2
NetC36_1: C36.1 C39.1 R22.1 U1.7 | length 11.9
  Top Layer w0.5: C39.1 24.473,92.2 ccw(c24.473,94.74) 26.269,92.944 R22.1 ; U1.7 27.535,94.225 cw(c27.5,94.225) R22.1 ; C36.1@32.825,95.25 32.519,94.944 cw(c30.723,96.74) 30.723,94.2 R22.1
NetC36_2: C36.2 P3.2 | length 4.5
  Top Layer w0.5: C36.2 P3.2
NetC37_2: C37.2 R21.2 | length 2
  Top Layer w0.5: C37.2@13.928,82.25 R21.2
NetC38_2: C38.2 R8.1 R9.1 R10.2 R12.1 U1.2 | length 15.3
  Top Layer w0.5: R8.1 R12.1 ; U1.2 27.535,106.563 ccw(c24.995,106.563) 26.791,108.359 R10.2 cw(c26.625,110.818) 25.003,109.197 R9.1 R12.1 ; C38.2 R12.1
NetC39_2: C39.2 R18.1 R20.1 R21.1 R22.2 U1.6 | length 27.8
  Top Layer w0.5: R21.1 R18.1 ; U1.6 24.995,96.397 cw(c22.455,96.397) 24.251,94.601 R20.1 17.481,87.019 ccw(c19.277,88.815) 19.277,86.275 22.248,86.275 ccw(c22.248,88.815) 24.044,87.019 C39.2 cw(c22.535,85.51) 24.925,85.51 R18.1 ; R22.2 cw(c26.559,86.166) 26.559,84.8 R18.1
NetDD7_3: DD7.3 DD7.4 | length 2.5
  Bottom Layer w0.3: DD7.3 DD7.4
NetDD11_1: DD11.1 G1.5 | length 6.4
  Top Layer w0.5: DD11.1 39.566,75.425 cw(c39.566,75.391) G1.5
NetDD12_AY1_1: DD12_AY1.1 R7_AY1.2 | length 5
  Top Layer w0.5: DD12_AY1.1 ccw(c-6.21,84.256) -7.365,83.1 R7_AY1.2
NetDD12_AY1_4: DD12_AY1.4 R5_AY1.2 R6_AY1.2 | length 15.8
  Top Layer w0.5: DD12_AY1.4 -9.877,78.669 ccw(c-8.081,80.465) -8.081,77.925 R5_AY1.2 R6_AY1.2
NetDD12_AY1_5: DD12_AY1.5 R4_AY1.2 | length 17.9
  Top Layer w0.5: DD12_AY1.5 -7.342,73.594 ccw(c-5.546,75.39) -5.546,72.85 R4_AY1.2
NetDD12_AY2_1: DD12_AY2.1 R7_AY2.2 | length 5.1
  Top Layer w0.5: DD12_AY2.1 ccw(c-6.125,102.036) -7.341,100.821 R7_AY2.2
NetDD12_AY2_4: DD12_AY2.4 R5_AY2.2 R6_AY2.2 | length 13.3
  Top Layer w0.5: DD12_AY2.4 -9.842,96.414 ccw(c-8.046,98.21) -8.046,95.67 R5_AY2.2
NetDD12_AY2_5: DD12_AY2.5 R4_AY2.2 | length 18
  Top Layer w0.5: DD12_AY2.5 -7.312,91.344 ccw(c-5.516,93.14) -5.516,90.6 R4_AY2.2
NetDD12_AY3_1: DD12_AY3.1 R7_AY3.2 | length 5
  Top Layer w0.5: DD12_AY3.1 ccw(c-6.161,119.816) -7.351,118.626 R7_AY3.2
NetDD12_AY3_4: DD12_AY3.4 R5_AY3.2 R6_AY3.2 | length 15.8
  Top Layer w0.5: DD12_AY3.4 -9.857,114.209 ccw(c-8.061,116.005) -8.061,113.465 R5_AY3.2 R6_AY3.2
NetDD12_AY3_5: DD12_AY3.5 R4_AY3.2 | length 17.9
  Top Layer w0.5: DD12_AY3.5 -7.307,109.119 ccw(c-5.511,110.915) -5.511,108.375 R4_AY3.2
R\P\L\Y\: DD8.3 P1.B15 P2.19 | length 44.7
  Top Layer w0.3: -13.725,44.9 -13.725,21.777 ccw(c-11.185,21.777) -12.981,19.981 -4.144,11.144 cw(c-5.94,9.348) -3.4,9.348 P1.B15
R_IN3: C37.1 R6_AY1.1 R6_AY2.1 R6_AY3.1 R7_AY1.1 R7_AY2.1 R7_AY3.1 R23.1 | length 52.1
  Top Layer w0.5: R6_AY1.1 3.989,75.676 cw(c5.785,77.472) 3.245,77.472 3.245,78.368 cw(c5.785,78.368) 3.989,80.164 R7_AY1.1 ; R7_AY3.1 3.989,115.704 ccw(c5.785,113.908) 3.245,113.908 3.245,113.012 ccw(c5.785,113.012) 3.989,111.216 R6_AY3.1 3.989,110.634 ccw(c5.785,108.838) 3.245,108.838 3.245,100.287 ccw(c5.785,100.287) 3.989,98.491 R7_AY2.1 3.989,97.909 ccw(c5.785,96.113) 3.245,96.113 3.245,95.217 ccw(c5.785,95.217) 3.989,93.421 R6_AY2.1 4.039,92.889 ccw(c5.835,91.093) 3.295,91.093 3.295,82.492 ccw(c5.835,82.492) 4.039,80.696 R7_AY1.1 ; R23.1 C37.1 cw(c4.617,86.583) 4.617,80.455 R7_AY1.1
S\Y\N\C\: C14.2 DD2.12 DD4.11 DD5.4 DD10.11 P2.20 | length 78.8
  Top Layer w0.3: -13.937,48.275 -14.059,48.275 ccw(c-14.059,46.909) -15.425,46.909 -15.425,46.227 cw(c-17.965,46.227) -16.169,44.431 -16.481,44.119 ccw(c-14.685,42.323) -17.225,42.323 -17.225,37.547 ccw(c-14.685,37.547) -16.481,35.751 DD4.11 -15.968,34.28 ccw(c-15.968,31.74) -17.764,33.536 -28.981,22.319 ; -12.875,51.827 C14.2 -12.875,56.985 cw(c-12.316,56.985) DD5.4 ; -28.981,22.319 cw(c-30.705,24.043) DD2.12 ccw(c-30.705,24.043) -28.981,22.319
  Bottom Layer w0.3: DD4.11 -14.074,33.344 ccw(c-12.278,35.14) -12.278,32.6 15.393,32.6 ccw(c15.393,35.14) 17.189,33.344 DD10.11
T/R\: DD1.1 DD3.1 DD7.11 | length 34
  Top Layer w0.3: DD1.1 8.381,28.694 ccw(c10.177,30.49) 10.177,27.95 38.683,27.95 ccw(c38.683,30.49) 40.479,28.694 DD3.1
W\T\B\T\: DD2.6 DD7.10 P2.13
pads on no net: DD9.9 DD9.10 DD9.13 DD10.2 DD10.4 DD10.17 DD10.19 DD11.3 DD11.6 DD11.8 DD11.9 DD11.10 DD11.11 DD12_AY1.2 DD12_AY1.7 DD12_AY1.8 DD12_AY1.9 DD12_AY1.10 DD12_AY1.11 DD12_AY1.12 DD12_AY1.13 DD12_AY1.14 DD12_AY2.2 DD12_AY2.7 DD12_AY2.8 DD12_AY2.9 DD12_AY2.10 DD12_AY2.11 DD12_AY2.12 DD12_AY2.13 DD12_AY2.14 DD12_AY3.2 DD12_AY3.7 DD12_AY3.8 DD12_AY3.9 DD12_AY3.10 DD12_AY3.11 DD12_AY3.12 DD12_AY3.13 DD12_AY3.14 G1.1 P1.A3 P1.A5 P1.A7 P1.A9 P1.A10 P1.A11 P1.A13 P1.A23 P1.B2 P1.B3 P1.B4 P1.B6 P1.B7 P1.B9 P1.B11 P2.8 P2.10 P2.12 P2.21 P2.23 P2.24 P2.51 P3. P3.0

## Silkscreen, mask and mechanical layers (free items; w line width, h text height)
PCB_Contour:
  the board outline again, w0.1